# Altium PCB ESCV2.PcbDoc
Units mil, origin at the board's own origin, x right, y up, seen from the top; angles counter-clockwise.
Board outline 2362.2 x 1181.1 mil, 2 copper layers (L1, L2), stack 65.792 mil thick; 69 components, 45 nets, 192 pads, 37 vias.
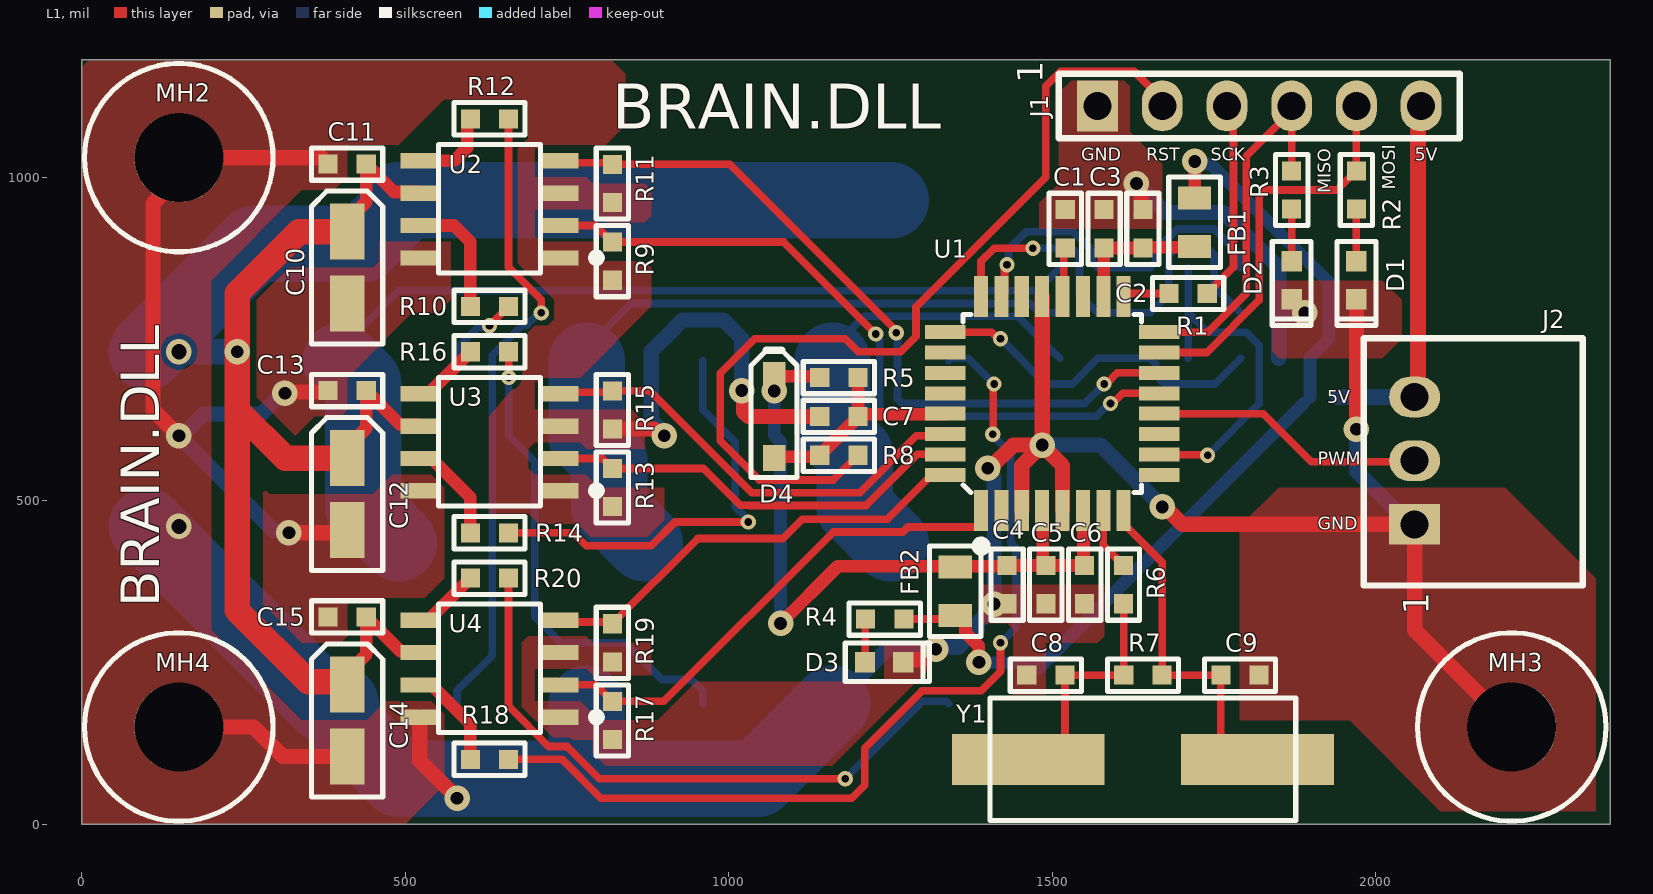
[diagram p0: L1 view]
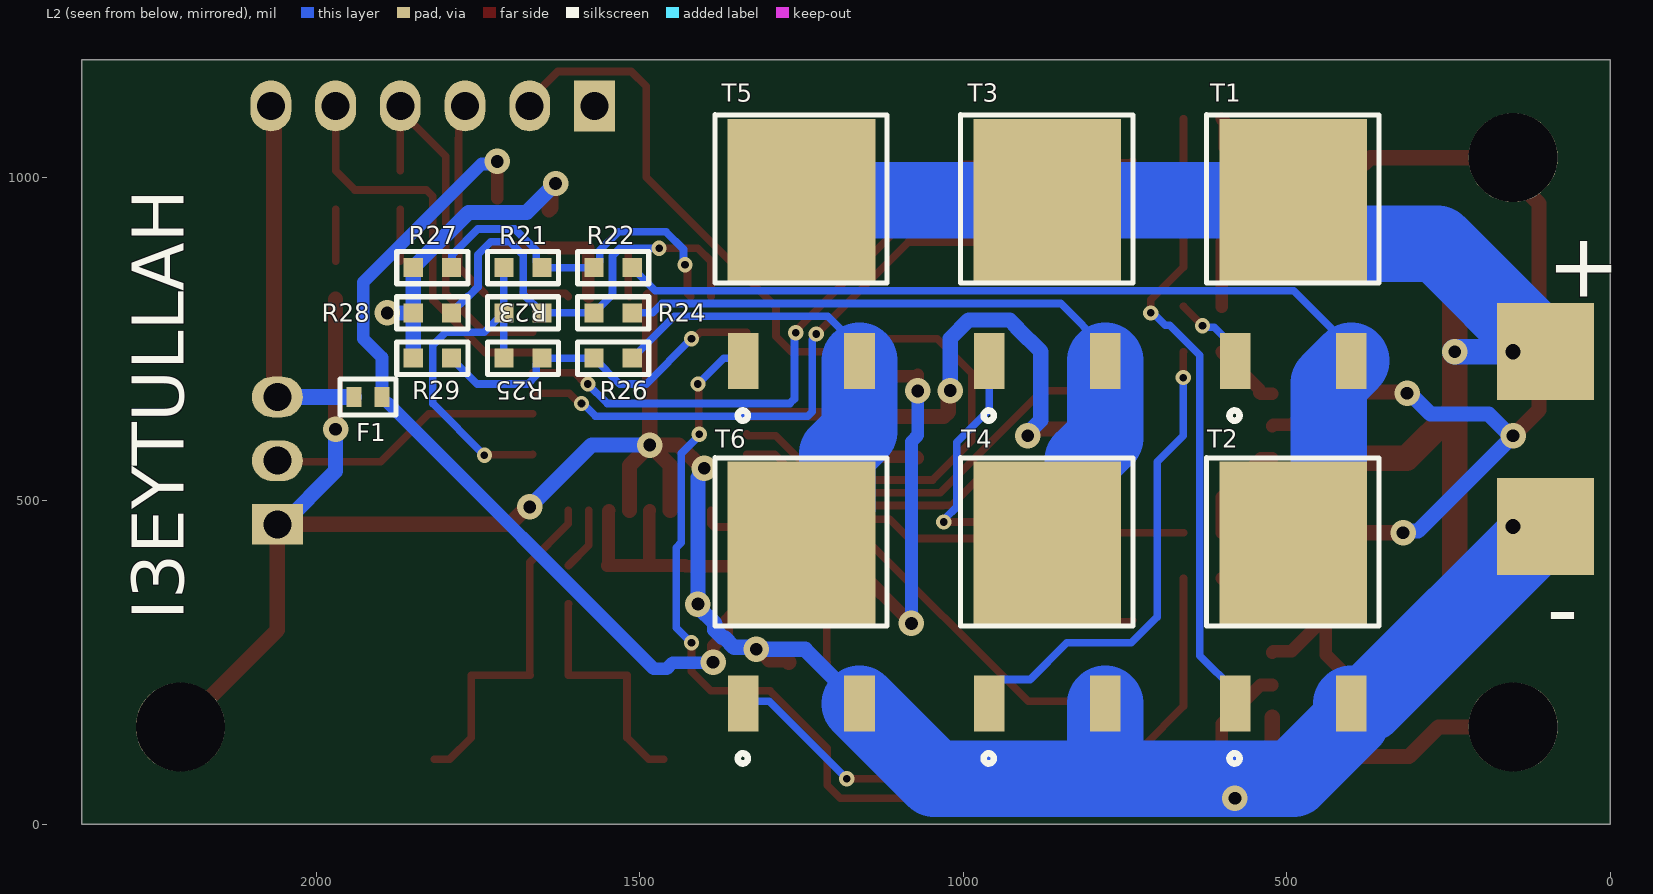
[diagram p1: L2 view, seen from below]
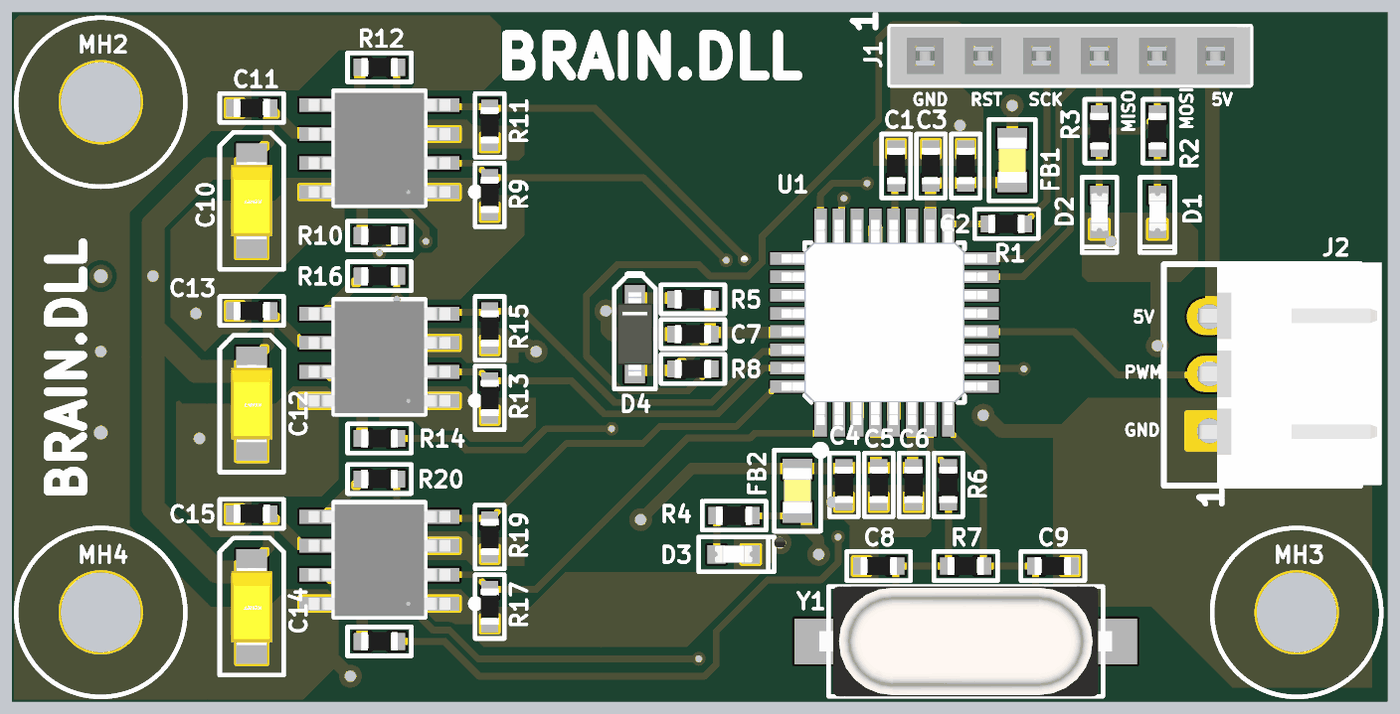
[diagram p2: 3D render of the assembled board from above, using the file's embedded part models]
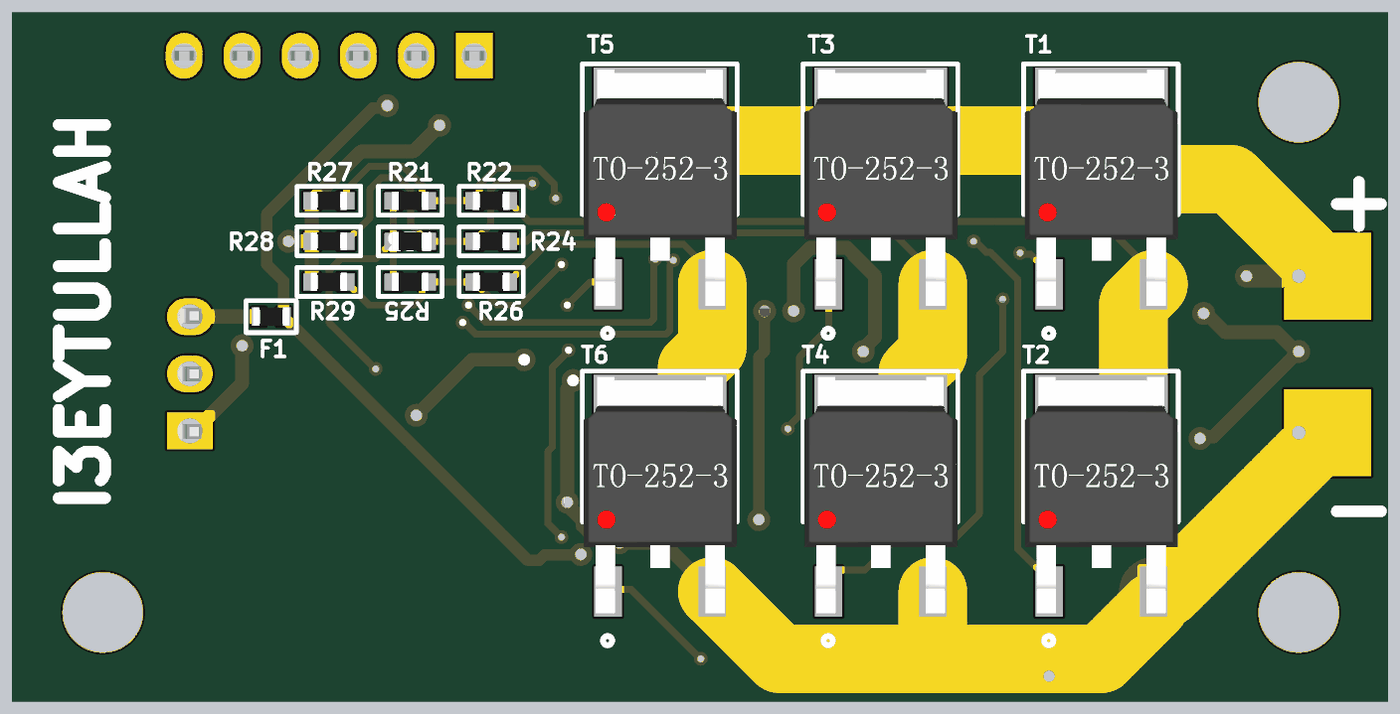
[diagram p3: 3D render of the assembled board from below, using the file's embedded part models]

## Layer stack, top to bottom
Top Solder: solder mask 0.4, Solder Resist, Dk 3.5
L1: signal copper 1.4
Dielectric 1: dielectric 62.9921, FR-4, Dk 4.8
L2: signal copper 1.4
Bottom Solder: solder mask 0.4, Solder Resist, Dk 3.5

## Board outline
0,0 0,1181.1 2362.2,1181.1 2362.2,0

## Design rules (kind name [scope] priority, off if disabled: settings)
Clearance [All] p1: gap=7.87 ignorepadtopadclearanceinfootprint=FALSE
ComponentClearance [All] p1: gap=7.87 collisioncheckmode=3 verticalgap=7.87 showdistances=FALSE
HoleSize [All] p1: absolutevalues=TRUE maxlimit=393.7 minlimit=7.87 maxpercent=80.000 minpercent=20.000
HoleToHoleClearance [All] p1: gap=11.81 allowstackedmicrovias=TRUE
MinimumSolderMaskSliver [All] p1: minsoldermaskwidth=3.94
PolygonConnect [All] p1: connectstyle=Direct reliefconductorwidth=10 reliefentries=4 polygonreliefangle="90 Angle" airgapwidth=10
RoutingVias [All] p1: holewidth=11.81 width=23.62 viastyle="Through Hole" minholewidth=11.81 minwidth=23.62 maxholewidth=23.62 maxwidth=39.37
SilkToSilkClearance [All] p1: silktosilkclearance=3.94
SilkToSolderMaskClearance [IsPad] p1: minsilkscreentomaskgap=0 clearancetoexposedcopper=TRUE
SilkToSolderMaskClearance U3-ALL [IsPad] p2: minsilkscreentomaskgap=3.94 clearancetoexposedcopper=TRUE
SolderMaskExpansion [All] p1: expansion=3.94 istentingtop=FALSE
Width Width_POWER [InNet('+*') or InNet('GND') OR InNet('phase*')] p1: maxlimit=118.11 minlimit=11.81 preferedwidth=11.81
Width [All] p2: maxlimit=19.68 minlimit=11.81 preferedwidth=11.81
24 further rules are at their usual default settings.

## Classes and differential pairs
component class ESC2: + - C10 C11 C12 C13 C14 C15 J2 MH2 MH3 MH4 R9 R10 R11 R12 R13 R14 R15 R16 R17 R18 R19 R20 R21 R22 R23 R24 R25 R26 R27 R28 R29 T1 T2 T3 T4 T5 T6 U2 U3 U4
component class ESC1: C1 C2 C3 C4 C5 C6 C7 C8 C9 D1 D2 D3 D4 F1 FB1 FB2 J1 R1 R2 R3 R4 R5 R6 R7 R8 U1 Y1

## Components (designator, comment, footprint, x,y, rotation, side; value= is the part's Value field where it differs from the comment)
+ "PAD" SQARE_PAD 100,730 r180 bottom (schematic designator P1)
- "PAD" SQARE_PAD 100,460 r180 bottom (schematic designator P2)
C1 "100nF" Z0603 1520,920 r90 top
C2 "10uF" Z0603 1640,920 r270 top
C3 "100nF" Z0603 1580,920 r270 top
C4 "10uF" Z0603 1430,370 r90 top
C5 "100nF" Z0603 1490,370 r90 top
C6 "100nF" Z0603 1550,370 r90 top
C7 "100nF" Z0603 1170,630 r0 top
C8 "22pF" Z0603 1490,230 r180 top
C9 "22pF" Z0603 1790,230 r0 top
C10 "1uF" "1206 TANTAL CAP" 410,860 r270 top
C11 "100nF" Z0603 410,1020 r180 top
C12 "1uF" "1206 TANTAL CAP" 410,510 r270 top
C13 "100nF" Z0603 410,670 r180 top
C14 "1uF" "1206 TANTAL CAP" 410,160 r270 top
C15 "100nF" Z0603 410,320 r180 top
D1 "GREEN" LED-0603 1970,840.47 r90 top
D2 "BLUE" LED-0603 1870,840.47 r90 top
D3 "RED" LED-0603 1240,250 r180 top
D4 "SS0540_R1_00001" SOD-123 1070,630 r270 top
F1 "FSMD075-0603RZ" F-0603 1920,660 r180 bottom
FB1 "LCB2012-110Y-N" C0805 1720,930 r270 top
FB2 "LCB2012-110Y-N" C0805 1350,360 r90 top
J1 "HEADER-FEMALE-1X6-2.54mm" FEMALE-1X6-2.54MM 1570,1110 r90 top
J2 "2.50 mm" L-KLS1-XL4-2.50-03-R 2060,561.57 r90 top
MH2 "MH_7.4MMC_3.2MMD" MH_7.4MMC_3.2MMD_NON_COPPER_NPLT 150,1030 r0 top
MH3 "MH_7.4MMC_3.2MMD" MH_7.4MMC_3.2MMD_NON_COPPER_NPLT 2210,150 r0 top
MH4 "MH_7.4MMC_3.2MMD" MH_7.4MMC_3.2MMD_NON_COPPER_NPLT 150,150 r0 top
R1 "22R" Z0603 1710,820 r180 top
R2 "1K" Z0603 1970,980 r90 top
R3 "1K" Z0603 1870,980 r90 top
R4 "1K" Z0603 1241,316.81 r0 top
R5 "10K" Z0603 1170,690 r180 top
R6 "22R" Z0603 1610,370 r90 top
R7 "1M" Z0603 1640,230 r0 top
R8 "100R" Z0603 1170,570 r180 top
R9 "4K7" Z0603 820,870 r90 top
R10 "100R" Z0603 630,800 r180 top
R11 "4K7" Z0603 820,990 r90 top
R12 "100R" Z0603 630,1090 r180 top
R13 "4K7" Z0603 820,520 r90 top
R14 "100R" Z0603 630,450 r180 top
R15 "4K7" Z0603 820,640 r90 top
R16 "100R" Z0603 630,730 r180 top
R17 "4K7" Z0603 820,160 r90 top
R18 "100R" Z0603 630,100 r180 top
R19 "4K7" Z0603 820,280 r90 top
R20 "100R" Z0603 630,380 r180 top
R21 "33K" Z0603 1680.47,860 r180 bottom
R22 "33K" Z0603 1540.94,860 r180 bottom
R23 "33K" Z0603 1680.47,790 r180 bottom
R24 "33K" Z0603 1540.94,790 r180 bottom
R25 "33K" Z0603 1680.47,720 r180 bottom
R26 "33K" Z0603 1540.94,720 r180 bottom
R27 "10K" Z0603 1820.47,860 r0 bottom
R28 "10K" Z0603 1820.47,790 r0 bottom
R29 "10K" Z0603 1820.47,720 r0 bottom
T1 "IRLR7843TRPBF" TO-252-3 490,840 r90 bottom
T2 "IRLR7843TRPBF" TO-252-3 490,310 r90 bottom
T3 "IRLR7843TRPBF" TO-252-3 870,840 r90 bottom
T4 "IRLR7843TRPBF" TO-252-3 870,310 r90 bottom
T5 "IRLR7843TRPBF" TO-252-3 1250,840 r90 bottom
T6 "IRLR7843TRPBF" TO-252-3 1250,310 r90 bottom
U1 "ATMEGA88PA-AU" TQFP32(ATMEGA88) 1500,650 r90 top
U2 "TC427COA" SOIC-8 630,950 r180 top
U3 "TC427COA" SOIC-8 630,590 r180 top
U4 "TC427COA" SOIC-8 630,240 r180 top
Y1 "AS-16.000-16-SMD-TR" AS-16.000-16-SMD-TR 1640,100 r0 top

## Footprints (in the part's own frame and the unit in brackets; to place one, negate y for a bottom-side part, rotate by r counter-clockwise, add the part's x,y. Pads: shape width x height; smd on the part's side, far side on the other; paste and mask are expansions set on the pad)
"1206 TANTAL CAP" [mm]
  rect 2.2x1.35 smd: 1(-1.41,0) 2(1.41,0)
  silkscreen extent -3,-1.4 3,1.4, body extent -1.7,-0.9 1.7,0.9, height 1.82
AS-16.000-16-SMD-TR [mm]
  rect 6x2 smd: 1(-4.5,0) 2(4.5,0)
  silkscreen extent -6,-2.4 6,2.4, body extent -6.4,-2.41 6.4,2.41, height 4.3
C0805 [mm]
  rect 0.9x1.3 smd: 1(-0.95,0) 2(0.95,0)
  silkscreen extent -1.78,-1.02 1.78,1.02, body extent -1,-0.63 1,0.63, height 0.7
F-0603 [mm]
  rect 0.6x0.8 smd: 1(-0.55,0) 2(0.55,0)
  silkscreen extent -1.1,-0.7 1.1,0.7, body extent -0.8,-0.4 0.8,0.4, height 0.46
FEMALE-1X6-2.54MM [mm]
  rect 2x1.6 hole 1.1: 1(0,0)
  oval 2x1.6 hole 1.1: 2(0,-2.54) 3(0,-5.08) 4(0,-7.62) 5(0,-10.16) 6(0,-12.7)
  silkscreen extent -1.27,-14.22 1.27,1.52, body extent -1.27,-14.22 1.27,1.52, height 8.8
L-KLS1-XL4-2.50-03-R [mm]
  rect 1.6x2 hole 1.1: 1(-2.5,0)
  oval 1.6x2 hole 1.1: 2(0,0) 3(2.5,0)
  silkscreen extent -4.9,-6.6 4.8,2, body extent -4.88,-7.53 4.88,0.5, height 5.85
LED-0603 [mm]
  rect 0.8x0.8 smd: 1(-0.75,0) 2(0.75,0)
  silkscreen extent -1.78,-0.76 1.52,0.76, body extent -0.82,-0.38 0.82,0.35, height 0.68
MH_7.4MMC_3.2MMD_NON_COPPER_NPLT [mm]
  round 3.5 hole 3.5: 1(0,0)
  silkscreen extent -3.7,-3.7 3.7,3.7
SOD-123 [mm]
  rect 1.02x0.88 smd: 1(-1.635,0) 2(1.635,0)
  silkscreen extent -2.6,-0.9 2.4,0.9, body extent -1.83,-0.77 1.83,0.77, height 1.46
SOIC-8 [mm]
  rect 1.52x0.6 smd: 1(-2.74,1.905) 2(-2.74,0.635) 3(-2.74,-0.635) 4(-2.74,-1.905) 5(2.74,-1.905) 6(2.74,-0.635) 7(2.74,0.635) 8(2.74,1.905)
  silkscreen extent -4.4,-2.54 2,2.5, body extent -3.1,-2.45 3.1,2.45, height 1.76
SQARE_PAD [mil]
  rect 150x150 smd paste-99999 mask+4: 1(0,0)
TO-252-3 [mm]
  rect 2.2x1.2 smd: 1(-3.15,2.28) 3(-3.15,-2.28)
  rect 6.4x5.8 smd: 2(3.15,0)
  silkscreen extent -5.5,-3.36 6.51,3.4, body extent -4.1,-3.35 6.25,3.35, height 2.41
TQFP32(ATMEGA88) [mm]
  rect 1.6x0.55 smd mask+0.06: 1(-4.2,2.8) 2(-4.2,2) 3(-4.2,1.2) 4(-4.2,0.4) 5(-4.2,-0.4) 6(-4.2,-1.2) 7(-4.2,-2) 8(-4.2,-2.8) 17(4.2,-2.8) 18(4.2,-2) 19(4.2,-1.2) 20(4.2,-0.4) 21(4.2,0.4) 22(4.2,1.2) 23(4.2,2) 24(4.2,2.8)
  rect 0.55x1.6 smd mask+0.06: 9(-2.8,-4.2) 10(-2,-4.2) 11(-1.2,-4.2) 12(-0.4,-4.2) 13(0.4,-4.2) 14(1.2,-4.2) 15(2,-4.2) 16(2.8,-4.2) 25(2.8,4.2) 26(2,4.2) 27(1.2,4.2) 28(0.4,4.2) 29(-0.4,4.2) 30(-1.2,4.2) 31(-2,4.2) 32(-2.8,4.2)
  silkscreen extent -5.8,-3.5 3.5,3.5, body extent -4.5,-4.5 4.5,4.5, height 1.18
Z0603 [mm]
  rect 0.75x0.75 smd: 1(-0.75,0) 2(0.75,0)
  silkscreen extent -1.4,-0.64 1.4,0.64, body extent -0.8,-0.4 0.8,0.4, height 0.46

## Part data
+ -: library part SQARE_PAD
C1 C3 C5 C6 C7 C11 C13 C15: library part CL10B104KB8NNNC, "Multi Layer Ceramic Capacitor (MLCC) / Cap Ceramic 0.1uF 50V X7R 10% Pad SMD 0603 125¡ãC T/R", Case Code (Metric)=1608, Case Code (Imperial)=0603, Dielectric=X7R, Manufacturer=Samsung, Max Operating Temperature=125°C, Min Operating Temperature=-55°C, Package Quantity=1, Supplier Part Number 1=7665443, Tolerance=10%, Voltage=50V, Capacitance=100nF, Case/Package=0603, Category="Ceramic Capacitors", ComponentLink4Description=OZDISAN_LINK, ComponentLink4URL=https://ozdisan.com/pasif-komponentler/kondansatorler/smt-smd-ve-mlcc-kondansatorler/CL10B104KB8NNNC, Construction=Flat, Contact Plating=Tin, Depth=0.8mm, Height=0.8mm, Lead Free="Lead Free", Length=1.6mm, Manufacturer Part Number=CL10B104KB8NNNC, Material=Ceramic, Mount="Surface Mount", OZDISAN_PRICE="0.05 TRY", Packaging="Tape and Reel", Pricing 1="4000=0,00800, 8000=0,00800, 16000=0,00800, 24000=0,00700, 40000=0,00600, 4000=0,00600, 8000=0,00600, 16000=0,00600, 24000=0,00500, 40000=0,00400 (USD)", Radiation Hardening=No, RoHS=Yes, RoHS Compliant=Yes, Series=CL, Stock 1=17024000, Supplier 1=RSComponents, Thickness=0.035inch, Voltage Rating=50V, Voltage Rating (DC)=50V, Width=0.031inch
C2 C4: library part CL10A106KP8NNNC, "Cap Ceramic 10uF 10V X5R 10% Pad SMD 0603 85C T/R", Case Code (Metric)=1608, Case Code (Imperial)=0603, Dielectric=X5R, Manufacturer=Samsung, Max Operating Temperature=85°C, Min Operating Temperature=-55°C, Package Quantity=1, Supplier Part Number 1=5232459, Tolerance=10%, Voltage Rating=10V, Capacitance=10uF, Case/Package=0603, Category="Ceramic Capacitors", ComponentLink4Description=OZDISAN_LINK, ComponentLink4URL=https://ozdisan.com/Product/Detail/350863/CL10A106KP8NNNC, Construction=Flat, Contact Plating=Tin, Depth=0.8mm, Height=0.8mm, Lead Free="Lead Free", Length=1.6mm, Manufacturer Part Number=CL10A106KP8NNNC, Material=Ceramic, Mount="Surface Mount", OZDISAN_PRICE="0.60 TRY", Packaging="Tape and Reel", Pricing 1="4000=0,03170, 8000=0,02840, 12000=0,02830, 20000=0,02810, 40000=0,02790 (USD)", Radiation Hardening=No, RoHS=Yes, RoHS Compliant=Yes, Series=CL, Stock 1=202000, Supplier 1="Future Electronics", Thickness=0.035inch, Voltage Rating (DC)=10V, Width=0.031inch
C8 C9: library part CL10C220JB8NNNC, "Ceramic capacitor SMD-0603 22pF /50V NP0# J +-5%, Samsung, RoHS", Case Code (Metric)=1608, Case Code (Imperial)=0603, Dielectric=C0G, Manufacturer=Samsung, Max Operating Temperature=125°C, Min Operating Temperature=-55°C, Package Quantity=1, Supplier Part Number 1=7665033, Temperature Coefficient=300ppm/°C, Tolerance=5%, Voltage=50V, Capacitance=22pF, Case/Package=0603, Category="Ceramic Capacitors", ComponentLink5Description=OZDISAN_LINK, ComponentLink5URL=https://ozdisan.com/pasif-komponentler/kondansatorler/smt-smd-ve-mlcc-kondansatorler/CL10C220JB8NNNC, Contact Plating=Tin, Depth=0.8mm, Height=0.8mm, Lead Free="Lead Free", Length=0.063inch, Manufacturer Part Number=CL10C220JB8NNNC, Material=Ceramic, Mount="Surface Mount", OZDISAN_PRICE="0.09 TRY", Packaging="Tape and Reel", Pricing 1="4000=0,01100, 8000=0,01100, 16000=0,01000, 24000=0,00800, 40000=0,00700 (USD)", Radiation Hardening=No, RoHS=Yes, RoHS Compliant=Yes, Series=CL, Stock 1=1, Supplier 1=RSComponents, Thickness=0.035inch, Voltage Rating=50V, Voltage Rating (DC)=50V, Width=0.031inch
C10 C12 C14: library part T491A105K035AT, "Cap Tant Solid 1uF 35V A CASE 10% (3.2 X 1.6 X 1.6mm) SMD 3216-18 7.5 Ohm 125 C T/R", Case Code (Metric)=3216, Case Code (Imperial)=1206, Dielectric Material=Tantalum, ESR (Equivalent Series Resistance)=7.5R, Leakage Current=500nA, Manufacturer=KEMET, Max Operating Temperature=125°C, Min Operating Temperature=-55°C, Package Quantity=1, Ripple Current=100mA, Supplier Part Number 1=399-8265-1-ND, Tolerance=20%, Voltage=25V, Voltage Rating=35V, Capacitance=1uF, Case/Package=1206, Category="Tantalum Capacitors", ComponentLink12Description=OZDISAN_LINK, ComponentLink12URL=https://ozdisan.com/pasif-komponentler/kondansatorler/tantal-kondansatorler/T491A105K035AT, Depth=1.6mm, Dissipation Factor=4%, Failure Rate=0.001%, Features="General Purpose", Height=1.6mm, Height - Seated (Max)=0.071inch, Lead Free="Lead Free", Length=3.2mm, Life (Hours)=2000Hour, Manufacturer Part Number=T491A105K035AT, Mount="Surface Mount,PCB", Number of Pins=2, OZDISAN_PRICE="1.78 TRY", Packaging="Tape and Reel", Polarity=Polar, Pricing 1="1=0,53000, 10=0,37100, 50=0,26000, 100=0,22290, 500=0,16716, 1000=0,14115 (USD)", Radiation Hardening=No, REACH SVHC="No SVHC", RoHS=Yes, RoHS Compliant=Yes, Stock 1=48, Supplier 1=Digi-Key, Termination=SMD/SMT, Voltage Rating (DC)=35V, Width=1.6mm
D1: library part HL-PST-1608U51GC, Case-Package=0603, ComponentLink1Description=OZDISAN_LINK, ComponentLink1URL=https://ozdisan.com/Product/Detail/471660/HL-PST-1608U51GC, OZDISAN_PRICE="0.22 TRY"
D2: library part 27-21/B7C-ZR1S1N/3C, Case-Package=0603, ComponentLink1Description=OZDISAN_LINK, ComponentLink1URL=https://ozdisan.com/led-ve-aydinlatma-cozumleri/led-komponentler/sinyal-ledler-renkli/27-21B7C-ZR1S1N3C, OZDISAN_PRICE="1,46 TRY"
D3: library part LTST-C190KRKT, "0603 red led alingap 631nm-639nm water clear 18-180mcd 130d", Case Code (Metric)=1608, Case Code (Imperial)=0603, Color=Red, Forward Current=30mA, Forward Voltage=2.4V, Lens Color=Colorless, Manufacturer="Vishay Lite-On", Max Operating Temperature=85°C, Min Operating Temperature=-55°C, Package Quantity=1, Power Dissipation=75mW, Reverse Voltage=5V, Supplier Part Number 1=160-1436-1-ND, Test Current=20mA, Case/Package=0603, Category=LEDs, ComponentLink10Description=OZDISAN_LINK, ComponentLink10URL=https://ozdisan.com/led-ve-aydinlatma-cozumleri/led-komponentler/sinyal-ledler-renkli/LTST-C190KRKT, Depth=0.8mm, Dominant Wavelength=631nm, Height=0.8mm, Lead Free="Lead Free", Length=1.6mm, Lens Style=Diffused,Colorless,Clear,Rectangular, Lens Transparency=Clear, Luminous Intensity=54mcd, Manufacturer Part Number=LTST-C190KRKT, Mount="Surface Mount", Number of Elements=1, Number of LEDs=1, Number of Pins=2, OZDISAN_PRICE="0.38 TRY", Packaging="Tape and Reel", Power Rating=75mW, Pricing 1="1=0,24000, 10=0,13200, 100=0,06110, 500=0,05640, 1000=0,04418, 2000=0,04324 (USD)", Radiation Hardening=No, RoHS=Yes, RoHS Compliant=Yes, Stock 1=874288, Supplier 1=Digi-Key, Viewing Angle=130°, Wavelength=639nm, Width=0.8mm, Illumination Color=Red
D4: "Diode Schottky 40V 0.5A 2-Pin SOD-123 T/R", Manufacturer="Pan Jit", Max Operating Temperature=125°C, Max Repetitive Reverse Voltage (Vrrm)=40V, Min Operating Temperature=-55°C, Peak Non-Repetitive Surge Current=5.5A, Supplier Part Number 1=3757-SS0540_R1_00001CT-ND, Category="Rectifier Diodes", ComponentLink3Description=OZDISAN_LINK, ComponentLink3URL=https://ozdisan.com/guc-yari-iletkenleri/diyotlar-modul-diyotlar-ve-dogrultucular/schottky-diyotlar/SS0540R100001, Element Configuration=Single, Manufacturer Part Number=SS0540_R1_00001, Mount="Surface Mount", OZDISAN_PRICE="0.55 TRY", Pricing 1="1=0,29000, 10=0,23400, 100=0,12410, 500=0,08168, 1000=0,05554 (USD)", Radiation Hardening=No, RoHS=Yes, RoHS Compliant=Yes, Stock 1=6025, Supplier 1=Digi-Key
F1: Case-Package=0603, Current Rating=0.75, Max Voltage=6V, ComponentLink1Description=OZDISAN_LINK, ComponentLink1URL=https://ozdisan.com/guc-yari-iletkenleri/devre-koruyucu-komponentler/ptc-sigortalar/FSMD075-0603RZ, OZDISAN_PRICE="3.16 TRY"
FB1 FB2: Case-Package=0603, ComponentLink1Description=OZDISAN_LINK, ComponentLink1URL=https://ozdisan.com/pasif-komponentler/induktorler/bead-feritler/LCB2012-110Y-N, OZDISAN_PRICE="0,22 TRY"
J1: library part PPPC061LFBN-RC, "CONN HDR 6POS 0.1 GOLD PCB", Color=Black, Manufacturer=Sullins, Package Quantity=1000, Supplier Part Number 1=S7039-ND, Category=Connectors, ComponentLink1Description=https://media.digikey.com/pdf/Data%20Sheets/Sullins%20PDFs/Female_Headers.100_DS.pdf?src-supplier=Digi-Key, ComponentLink1URL=https://media.digikey.com/pdf/Data%20Sheets/Sullins%20PDFs/Female_Headers.100_DS.pdf?src-supplier=Digi-Key, Connector Type=Header,Socket, Contact Material=Bronze, Contact Plating=Gold, Height=8.5mm, Housing Material=Plastic, Lead Free="Lead Free", Length=15.7mm, Manufacturer Part Number=PPPC061LFBN-RC, Mount="Through Hole", Number of Positions=6, Number of Rows=1, Packaging=Bulk, Pitch=0.1inch, Pricing 1="1=0,53000, 10=0,46500, 80=0,38300, 440=0,33300, 1000=0,27472, 5000=0,24142, 10000=0,24050 (USD)", RoHS=Yes, Stock 1=33601, Supplier 1=Digi-Key, Termination=Solder, Width=2.5mm
J2: library part L-KLS1-XL4-2.50-03-R, ComponentLink1Description=OZDISAN_LINK, ComponentLink1URL=https://ozdisan.com/konnektor-ve-baglanti-elemanlari/konnektor-cesitleri/pcb-konnektorler/L-KLS1-XL4-2-50-03-R, OZDISAN_PRICE="0,27 TRY"
MH2 MH3 MH4: library part MH_7.4MMNC_3.2MMD, "Mounting Hole 7.4 mm Diameter (Non Copper), 3.2 mm Drill NPTH"
R1 R6: library part MC0603SAF220JT5E, "MULTICOMP         MC0603SAF220JT5E            RESISTOR, THICK FILM, 22OHM, 100mW, 1%", Case Code (Metric)=1608, Case Code (Imperial)=0603, Manufacturer=Multicomp, Power Rating=100mW, Resistance Tolerance=1%, Resistor Type="Thick Film", Supplier Part Number 1=79M5934, Temperature Coefficient=100ppm/°C, Voltage Rating=75V, Case/Package=0603, Category=Resistors, ComponentLink2Description=OZDISAN_LINK, ComponentLink2URL=https://ozdisan.com/pasif-komponentler/direncler/smt-smd-ve-cip-direncler/0603SAF220JT5E, Manufacturer Part Number=MC0603SAF220JT5E, Number of Pins=2, OZDISAN_PRICE="0.02 TRY", Packaging="Cut Tape", REACH SVHC=Unknown, Resistance=22R, RoHS=Yes, RoHS Compliant=Yes, Supplier 1=Newark, Tolerance=1%, Voltage Rating (DC)=75V
R2 R3 R4: library part MC0603SAF1001T5E, "MULTICOMP - MC0603SAF1001T5E - THICK FILM RESISTOR, 1KOHM, 100mW, 1%", Case Code (Metric)=1608, Case Code (Imperial)=0603, Manufacturer=Multicomp, Power Rating=100mW, Resistance=1kR, Resistance Tolerance=1%, Resistor Type="Thick Film", Supplier Part Number 1=1632391, Temperature Coefficient=100ppm/°C, Voltage Rating=75V, Case/Package=0603, Category=Resistors, ComponentLink2Description=OZDISAN_LINK, ComponentLink2URL=https://ozdisan.com/pasif-komponentler/direncler/smt-smd-ve-cip-direncler/0603SAF1001T5E, Manufacturer Part Number=MC0603SAF1001T5E, OZDISAN_PRICE="0.02 TRY", Packaging="Cut Tape", Pricing 1="1=0,00890, 10=0,00810, 100=0,00730, 1000=0,00390 (GBP)", REACH SVHC=Unknown, RoHS=Yes, RoHS Compliant=Yes, Stock 1=340, Supplier 1=Farnell, Tolerance=1%, Voltage Rating (DC)=75V
R5 R27 R28 R29: library part CQ03SAF1002T5E, Case-Package=0603, ComponentLink1Description=OZDISAN_LINK, ComponentLink1URL=https://ozdisan.com/pasif-komponentler/direncler/smt-smd-ve-cip-direncler/CQ03SAF1002T5E, OZDISAN_PRICE="0.03 TRY"
R7: library part MC0603SAF1004T5E, "Res General Purpose Thick Film 0603 1M Ohm 1% 1/10W ±100ppm/°C Molded T/R", Case Code (Metric)=1608, Case Code (Imperial)=0603, Manufacturer=Multicomp, Power Rating=100mW, Resistance=1MR, Resistance Tolerance=1%, Resistor Type="Thick Film", Supplier Part Number 1=1631320, Temperature Coefficient=100ppm/°C, Voltage Rating=75V, Case/Package=0603, Category=Uncategorized, ComponentLink1Description=https://datasheet.ciiva.com/7919/ta-677-7919113.pdf?src-supplier=Element14, ComponentLink1URL=https://datasheet.ciiva.com/7919/ta-677-7919113.pdf?src-supplier=Element14, ComponentLink2Description=ÖZDISAN_LINK, ComponentLink2URL=https://ozdisan.com/pasif-komponentler/direncler/smt-smd-ve-cip-direncler/0603SAF1004T5E, Manufacturer Part Number=MC0603SAF1004T5E, OZDISAN_PRICE="0.02 TRY", Packaging="Cut Tape", Pricing 1="1=0,00910, 10=0,00830, 100=0,00740, 1000=0,00400 (GBP)", REACH SVHC=Unknown, RoHS=Yes, RoHS Compliant=Yes, Stock 1=15998, Supplier 1=Farnell, Tolerance=1%, Voltage Rating (DC)=75V
R8 R10 R12 R14 R16 R18 R20: library part 0603SAJ0101T5E, Case-Package=0603, ComponentLink1Description=OZDISAN_LINK, ComponentLink1URL=https://ozdisan.com/pasif-komponentler/direncler/smt-smd-ve-cip-direncler/0603SAJ0101T5E, OZDISAN_PRICE="0.02 TRY"
R9 R11 R13 R15 R17 R19: library part MC0603SAF4701T5E, "RES, THICK FILM, 4K7, 1%, 0.1W, 0603; Resistance: 4.7kohm; Resistance Tolerance: ± 1%; Power Rating: 100mW; Resistor...", Case Code (Metric)=1608, Case Code (Imperial)=0603, Manufacturer=Multicomp, Power Rating=100mW, Resistance=4.7kR, Resistance Tolerance=1%, Resistor Type="Thick Film", Supplier Part Number 1=1632439, Temperature Coefficient=100ppm/°C, Voltage Rating=75V, Case/Package=0603, Category=Uncategorized, ComponentLink2Description=OZDISAN_LINK, ComponentLink2URL=https://ozdisan.com/pasif-komponentler/direncler/smt-smd-ve-cip-direncler/0603SAF4701T5E, Manufacturer Part Number=MC0603SAF4701T5E, Number of Pins=2, OZDISAN_PRICE="0.02 TRY", Packaging="Cut Tape", Pricing 1="1=0,00890, 10=0,00810, 100=0,00730, 1000=0,00400 (GBP)", REACH SVHC=Unknown, RoHS=Yes, RoHS Compliant=Yes, Supplier 1=Farnell, Tolerance=1%, Voltage Rating (DC)=75V
R21 R22 R23 R24 R25 R26: library part RI0603L3302FT, Case-Package=0603, ComponentLink1Description=OZDISAN_LINK, ComponentLink1URL=https://ozdisan.com/pasif-komponentler/direncler/smt-smd-ve-cip-direncler/TC0325B3302T5C, OZDISAN_PRICE="0.09 TRY"
T1 T2 T3 T4 T5 T6: "MOSFET, 30V, 161A, 3.3 mOhm, 34 nC Qg, Logic Level, D-Pak", Case/Package=DPAK, Continuous Drain Current (ID)=161A, Drain to Source Breakdown Voltage=30V, Drain to Source Resistance=3.3mR, Drain-source On Resistance-Max=3.3MR, Gate to Source Voltage (Vgs)=20V, Manufacturer="International Rectifier", Max Operating Temperature=175°C, Max Power Dissipation=140W, Min Operating Temperature=-55°C, Package Quantity=1, Supplier Part Number 1=70017418, Input Capacitance=4.38nF, Category=MOSFETs, ComponentLink1Description=OZDISAN_LINK, ComponentLink1URL=https://www.ozdisan.com/guc-yari-iletkenleri/mosfetler/mosfet-discrete/IRLR7843TRPBF, Current Rating=161A, Drain to Source Voltage (Vdss)=30V, Element Configuration=Single, Fall Time=19ns, Height=2.39mm, Lead Free="Lead Free", Length=6.73mm, Manufacturer Part Number=IRLR7843TRPBF, Mount="Surface Mount", Nominal Vgs=2.3V, Number of Elements=1, Number of Pins=3, On-State Resistance=3.3MR, OZDISAN_PRICE="14,41 TRY", Packaging="Cut Tape", Power Dissipation=140W, Radiation Hardening=No, Rds On Max=3.3mR, REACH SVHC="No SVHC", Rise Time=42ns, RoHS=Yes, RoHS Compliant=Yes, Series=HEXFET®, Supplier 1="Allied Electronics", Turn-Off Delay Time=34ns, Turn-On Delay Time=25ns, Voltage Rating (DC)=30V, Width=6.22mm
U1: "MCU 8-bit ATmega AVR RISC 8KB Flash 2.5V/3.3V/5V 32-Pin TQFP", Case/Package=A, Frequency=20MHz, Manufacturer="Microchip / Atmel", Max Operating Temperature=85°C, Max Supply Voltage=5.5V, Min Operating Temperature=-40°C, Min Supply Voltage=1.8V, Package Quantity=250, Voltage=5V, Category=Microcontrollers, ComponentLink4Description=OZDISAN_LINK, ComponentLink4URL=https://ozdisan.com/entegre-devreler-ics/embedded-entegreler/mikroislemciler/ATMEGA88PA-AU, Contact Plating=Tin,Matte, Core Architecture=AVR, Data Bus Width=8b, Density=8KB, Height=1.05mm, Lead Free="Lead Free", Length=7mm, Manufacturer Part Number=ATMEGA88PA-AU, Max Frequency=20MHz, Memory Size=8KB, Memory Type=FLASH, Mount="Surface Mount", Number of ADC Channels=8, Number of Pins=32, Number of Programmable I/O=23, Number of PWM Channels=6, Number of SPI Channels=1, Number of Timers/Counters=3, Number of I2C Channels=1, Number of I/Os=23, Oscillator Type=Internal, OZDISAN_PRICE="33,63 TRY", Packaging=Tray, Peripherals="Brown-out Detect/Reset,POR,PWM,WDT", Radiation Hardening=No, RAM Size=1KB, REACH SVHC="No SVHC", RoHS=Yes, Series="AVR® ATmega", Supplier 1="Arrow Electronics", Supplier Part Number 1=ATMEGA88PA-AU, Termination=SMD/SMT, Watchdog Timer=Yes, Width=7mm, Interface=SPI,UART,I2C,USART,2-Wire
U2 U3 U4: "IC MOSFET DVR 1.5A DUAL HS 8SOIC", Case/Package=SOIC, Manufacturer=Microchip, Max Operating Temperature=70°C, Max Output Current=1.5A, Max Power Dissipation=470mW, Max Supply Current=8mA, Max Supply Voltage=18V, Min Operating Temperature=0°C, Min Supply Voltage=4.5V, Operating Supply Voltage=16V, Package Quantity=100, Supplier Part Number 1=TC427COA-ND, Category="Gate Drivers", ComponentLink5Description=OZDISAN_LINK, ComponentLink5URL=https://ozdisan.com/entegre-devreler-ics/guc-entegreleri/guc-surucu-entegreleri/TC427COA, Fall Time=30ns, Height=1.42mm, Lead Free="Lead Free", Length=4.9mm, Manufacturer Part Number=TC427COA, Mount="Surface Mount", Nominal Supply Current=8mA, Number of Drivers=2, Number of Outputs=2, Number of Pins=8, Output Impedance=6R, OZDISAN_PRICE="20,56 TRY", Packaging=Rail/Tube, Power Dissipation=470mW, Pricing 1="1=1,45000, 25=1,19800, 100=1,08120 (USD)", Propagation Delay=75ns, Radiation Hardening=No, REACH SVHC="No SVHC", Rise Time=30ns, RoHS=Yes, RoHS Compliant=Yes, Series=-, Stock 1=562, Supplier 1=Digi-Key, Supply Current=8mA, Turn-On Delay Time=75ns, Width=3.91mm
Y1: "AS-SMD Series 16 MHz ±30 ppm 16pF -20°C TO +70°C SMT Microprocessor Crystal", Capacitance=1.6E-11F, Frequency=16MHz, Frequency Tolerance=30ppm, Load Capacitance=16pF, Manufacturer="Raltron Electronics", Max Operating Temperature=70°C, Min Operating Temperature=-20°C, Supplier Part Number 1=5574900, ComponentLink2Description=OZDISAN_LINK, ComponentLink2URL=https://ozdisan.com/Product/Detail/40446/AS-16-000-16-SMD-TR, Lead Free="Lead Free", Manufacturer Part Number=AS-16.000-16-SMD-TR, OZDISAN_PRICE="1.95 TRY", Pricing 1="1000=0,12700 (USD)", RoHS=Yes, Supplier 1="Future Electronics"

## Via types
v1: diameter 39.37, hole 19.68, L1 to L2, tented both sides, 19 vias
v2: diameter 23.62, hole 11.81, L1 to L2, tented both sides, 16 vias
v3: diameter 39.37/23.62 (per signal layer), hole 23.62, L1 to L2, 2 vias

## Nets (pads, with @x,y where several pads share a name; then routed paths per layer and width w, separated by ;. In a path a pad name is that pad's centre, name@x,y a point inside that pad or via, vN(x,y) a via of type N, cw(c..) or ccw(c..) an arc to the next point about the centre after c; other vN are vias at no path point)
+5V: F1.1 J1.6 J2.3 | length 572.5
  L1 w25: J2.3 2065,665 2065,1105 J1.6
  L2 w25: F1.1 J2.3
+5VCC: F1.2 FB1.1 FB2.1 R4.2 | length 1385
  L1 w11.81: R4.2 1344.21,316.81 FB2.1
  L1 w19.68: R4.2 R4.2@1273.42,319.7 ; FB2.1 1357.87,322.6 1365.75,314.72 1365.75,295.72 1386.23,275.24 1386.23,250.3 v1(1386.54,250) ; FB1.1 v1(1720,1024.07)
  L2 w19.68: v1(1386.54,250) 1387.41,249.12 1449.06,249.12 1458.18,240 1478.35,240 F1.2@1888.5,650.16 ; v1(1720,1024.07) 1723.77,1020.3 1744.28,1020.3 1927.4,837.18 1927.4,750.23 1898.35,721.17 F1.2
+AREF: C1.1 U1.20 | length 76.9
  L1 w11.81: U1.20 1517.87,817.48 1517.87,888.35 C1.1
+AVCC: C2.2 C3.2 FB1.2 U1.18 | length 216.5
  L1 w19.68: U1.18 1579.37,815.98 1579.37,889.84 C3.2 C2.2 1641.06,891.54 1718.94,891.54 FB1.2
+VCC: C4.2 C5.2 C6.2 D4.1 FB2.2 R5.2 U1.4 U1.6 | length 1138.5
  L1 w19.68: v1(1070,669.37) D4.1 ; D4.1@1072.19,692.18 1138.29,692.18 R5.2 ; v1(1080,310) 1168.46,398.46 1428.94,398.46 C4.2 C5.2 ; U1.4 1485.24,483.66 1485.24,404.29 C5.2 ; U1.6 1548.23,483.66 1548.23,401.3 C6.2 C5.2
  L2 w19.68: v1(1070,669.37) 1070.16,669.21 1070.16,600.79 1080,590.94 v1(1080,310)
+VMN: +.1 C10.1 C11.1 C12.1 C13.1 C14.1 C15.1 T1.2 T3.2 T5.2 U2.6 U3.6 U4.6 | length 3173.8
  L1 w19.68: C14.1 410,232.24 439.53,261.77 C15.1 492.56,266.97 520.16,266.97 U4.6 ; C12.1 410,582.24 439.53,611.77 C13.1 492.56,616.97 520.16,616.97 U3.6 ; C10.1 410,932.24 439.53,961.77 C11.1 482.56,976.97 520.16,976.97 U2.6
  L1 w39.37: C14.1 405.51,220 350,220 240,330 240,640 ; C12.1 314.49,565.51 240,640 ; C10.1 335.51,915.51 240,820 v1(240,730) 240,640
  L2 w39.37: +.1 v1(240,730)
  L2 w118.11: +.1 267.09,897.09 434.88,897.09 490,952.2 T1.2 T3.2 T5.2
  other v3: 150,730
A0: R21.2 R22.1 R27.1 U1.23 | length 552.1
  L1 w11.81: U1.23 1426.18,820.28 1426.18,857.39 1430,861.21 v2(1430,864.41)
  L2 w11.81: v2(1430,864.41) 1432.26,866.67 1432.26,888.45 1459.4,915.59 1532.68,915.59 1561.61,886.66 1561.61,868.86 R22.1 R21.2 1659.8,868.86 1659.8,886.66 1692.83,919.68 1750.32,919.68 1790,880 1790,860.94 R27.1
A1: R23.2 R24.1 R28.1 U1.24 | length 696.9
  L1 w11.81: U1.24@1390.35,815.95 U1.24 1389.76,869.76 1410,890 v2(1470,890)
  L2 w11.81: v2(1470,890) 1530.43,890 1541.93,878.5 1541.93,818.54 R24.1 R23.2 1680,819.06 1680,879.01 1700.99,900 1730,900 1750,880 1750,830 1764.44,815.56 1765.38,815.56 R28.1
A2: R25.2 R26.1 R29.1 U1.25 | length 549.7
  L1 w11.81: U1.25 1406.57,760.24 1416.8,750 v2(1420,750)
  L2 w11.81: v2(1420,750) 1490,680 1530.47,680 R26.1 R25.2 1659.8,711.14 1659.8,693.34 1673.15,680 1750.94,680 R29.1
AH: R9.2 U1.13 U2.2 | length 1131.6
  L1 w11.81: U2.2 794.53,925 R9.2 1085.05,899.53 v2(1227.24,757.34) ; v2(1590,650) 1593.2,650 1608.94,665.75 U1.13
  L2 w11.81: v2(1227.24,757.34) 1227.24,754.14 1233.07,748.31 1233.07,636.93 1240,630 1568.24,630 1588.24,650 v2(1590,650)
AIN0: R21.1 R23.1 R25.1 U1.10 | length 549
  L1 w11.81: U1.10 1665.98,570.63 1739.37,570.63 v2(1740,570)
  L2 w11.81: R25.1 R23.1 ; R21.1 R23.1 ; v2(1740,570) 1820,650 1820,739.96 1799.96,760 1740,760 R23.1
AL: R11.2 U1.14 U2.4 | length 1162.8
  L1 w11.81: U2.4 740.61,1022.26 817.26,1022.26 R11.2 1001.24,1019.53 1258.69,762.08 v2(1258.69,759.13) ; v2(1580,680) 1583.2,680 1600.44,697.24 U1.14
  L2 w11.81: v2(1258.69,759.13) 1260.79,757.03 1260.79,656.92 1267.71,650 1550,650 v2(1580,680)
BH: R13.2 U1.31 U3.2 | length 659.5
  L1 w11.81: U3.2 804.53,565 R13.2 960.47,549.53 1017.59,492.41 1030.65,492.41 1212.4,492.4 1291.26,571.26 U1.31
BL: R15.2 U1.30 U3.4 | length 701.4
  L1 w11.81: U3.4 740.14,667.26 817.74,667.26 R15.2 877.8,669.53 1035.23,512.1 1038.8,512.1 1202.09,512.09 1290,600 1331.89,600 U1.30
CH: R17.2 U1.1 U4.2 | length 796.8
  L1 w11.81: U4.2 794.53,215 R17.2 899.53,189.53 1161.26,451.26 1269.15,451.26 1276.95,459.06 1384.84,459.06 1389.76,463.98 U1.1
CL: R19.2 U1.32 U4.4 | length 694.4
  L1 w11.81: U4.4 740.61,312.26 817.26,312.26 R19.2 951.7,441.23 1083.57,441.23 1113.29,470.94 1245.16,470.94 1313.98,539.76 U1.32
GND: -.1 C1.2 C2.1 C3.1 C4.1 C5.1 C6.1 C7.1 C8.2 C9.2 C10.2 C11.2 C12.2 C13.2 C14.2 C15.2 D1.1 D2.1 D3.1 J1.1 J2.1 MH2.1 MH3.1 MH4.1 R9.1 R11.1 R13.1 R15.1 R17.1 R19.1 R27.2 R28.2 R29.2 T2.3 T4.3 T6.3 U1.3 U1.5 U1.21 U2.1 U2.3 U2.8 U3.1 U3.3 U3.8 U4.1 U4.3 U4.8 | length 6809.6
  L1 w23.62: MH4.1 265.31,150 310.82,104.49 C14.2 ; v1(150,600) 110,640 110,959.1 150,999.1 MH2.1 370.47,1030 C11.2 ; v1(313.94,665.63) 316.12,667.81 378.29,667.81 C13.2 ; v1(320,450) 405.51,450 C12.2 ; U4.8 522.13,97.87 v1(580,40) ; R15.1 885.27,610.47 895.74,600 v1(900,600) ; v1(1020,670) 1023.01,666.99 1023.01,636.99 1030,630 C7.1 ; D3.1 1273.46,253.94 1299.68,253.94 1315.74,270 v1(1320,270) ; v1(1400,550) 1403.96,550 1439.71,585.75 v1(1484.25,585.75) ; U1.3 1452.76,554.25 v1(1484.25,585.75) ; U1.21 v1(1484.25,585.75) ; U1.5 1515.75,554.25 v1(1484.25,585.75) ; v1(1630,990) 1630,985.74 1637.05,978.69 1637.05,952.48 C2.1 ; v1(1670,490) 1674.26,490 1701.11,463.15 J2.1 2060,300 MH3.1 ; v1(1970,610) D1.1
  L2 w23.62: v1(313.94,665.63) 309.67,665.63 277.63,633.58 187.84,633.58 154.26,600 v1(150,600) 296.99,453.01 316.99,453.01 v1(320,450) ; v1(900,600) 900,604.26 880,624.26 880,730 916.46,766.46 916.46,767.45 927.99,778.98 991.54,778.98 1020,750.52 v1(1020,670) ; T6.3 1160.24,205.67 1172.05,217.48 1191.73,217.48 1244.25,270 v1(1320,270) 1323.01,273.01 1353.87,273.01 1369.2,288.35 1372.33,288.35 1383.86,299.88 1383.86,309.6 1410,335.74 v1(1410,340) 1410,535.74 1400,545.74 v1(1400,550) ; v1(1484.25,585.75) 1574.25,585.75 v1(1670,490) ; J1.1@1570,1102.13 J1.1 ; v1(1630,990) 1674.72,945.28 1764.72,945.28 R27.2 R28.2 ; R29.2 R28.2 ; v1(1890,790) R28.2 ; v1(1970,610) 1970,545.28 2052.13,463.15 J2.1 J2.1@2067.87,463.15
  L2 w118.11: -.1 374.02,185.98 T2.3 400.24,159.76 490,70 780,70 ; T4.3 780.24,70.24 780,70 ; T6.3 1044.25,70 780,70
  other v3: 150,460
MISO: J1.4 R3.2 U1.16 | length 571
  L1 w11.81: U1.16 1740.24,760.24 1800,820 1800,1032.13 J1.4@1870,1102.13 ; R3.2 J1.4@1870,1102.13 ; J1.4 J1.4@1870,1102.13
MOSI: J1.5 R2.2 U1.15 | length 615.1
  L1 w11.81: U1.15 1738.74,728.74 1820,810 1820,970 1830,980 1940.47,980 R2.2 J1.5
NetC8_1: C8.1 R6.1 R7.1 Y1.1 | length 368.7
  L1 w11.81: Y1.1 1486.06,100 1519.53,133.46 C8.1 R7.1 1610.24,230.24 1610.24,340.24 R6.1
NetD1_2: D1.2 R2.1 | length 80.5
  L1 w11.81: D1.2 R2.1
NetD2_2: D2.2 R3.1 | length 80.5
  L1 w11.81: D2.2 R3.1
NetD3_2: D3.2 R4.1 | length 67.2
  L1 w11.81: D3.2 1210.97,250.5 1210.97,316.3 R4.1
NetR1_2: R1.2 U1.17 | length 72.2
  L1 w11.81: U1.17 1614.88,820 R1.2
NetR10_1: R10.1 T1.1 | length 126.4
  L1 w11.81: v2(630,770) 630,770.47 R10.1
  L2 w11.81: T1.1 579.76,735.67 611.83,767.74 627.74,767.74 v2(630,770)
NetR10_2: R10.2 U2.7 | length 188.4
  L1 w19.68: U2.7 575,925 600.47,899.53 R10.2
NetR12_1: R12.1 T2.1 | length 984.7
  L1 w11.81: R12.1 659.53,860.47 710,810 v2(710,790)
  L2 w11.81: T2.1 579.76,205.67 634.41,260.31 634.41,724.41 681.04,771.04 687.84,771.04 706.8,790 v2(710,790)
NetR12_2: R12.2 U2.5 | length 128.4
  L1 w19.68: U2.5 575,1025 595.71,1045.71 595.71,1085.24 R12.2
NetR14_1: R14.1 T3.1 | length 672.1
  L1 w11.81: R14.1 759.76,450 779.76,430 880,430 916.82,466.82 v2(1029.91,466.82)
  L2 w11.81: T3.1 959.76,640.24 1010,590 1010,490 1027.65,472.35 1027.65,469.08 v2(1029.91,466.82)
NetR14_2: R14.2 U3.7 | length 158.1
  L1 w19.68: U3.7 540.24,565 600.47,504.76 R14.2
NetR16_1: R16.1 T4.1 | length 753.6
  L1 w11.81: R16.1 659.76,729.76 659.76,690.24 v2(660,690)
  L2 w11.81: v2(660,690) 660,600 700,560 700,320 740,280 840,280 896.61,223.39 942.05,223.39 959.76,205.67 T4.1
NetR16_2: R16.2 U3.5 | length 108.1
  L1 w19.68: U3.5 540.24,665 542.2,666.97 542.2,671.73 R16.2
NetR18_1: R18.1 T5.1 | length 1457.9
  L1 w11.81: R18.1 742.16,100 802.16,40 1190,40 1210,60 1210,117.33 1298.65,205.98 1389.84,205.98 1420,236.14 v2(1420,280) ; v2(1407.73,602.27) 1408.86,603.41 1408.86,678.86 v2(1410,680)
  L2 w11.81: T5.1 1343.78,720 1370,720 v2(1410,680) ; v2(1407.73,602.27) 1407.73,600.51 1435.59,572.65 1435.59,435.13 1443.46,427.25 1443.46,303.46 v2(1420,280)
NetR18_2: R18.2 U4.7 | length 158.1
  L1 w19.68: U4.7 540.24,215 600.47,154.76 R18.2
NetR20_1: R20.1 T6.1 | length 975.9
  L1 w11.81: R20.1 659.53,182.13 721.97,119.69 750.32,119.69 800,70 v2(1180,70)
  L2 w11.81: v2(1180,70) 1300,190 1335.75,190 T6.1
NetR20_2: R20.2 U4.5 | length 108.1
  L1 w19.68: U4.5 540.24,315 542.2,316.97 542.2,321.73 R20.2
phaseA: R22.2 T1.3 T2.2 | length 1501.5
  L2 w11.81: T1.3 400.24,735.67 488.82,824.25 1475.67,824.25 R22.2
  L2 w118.11: T1.3 434.88,681.34 434.88,489.13 T2.2
phaseB: R24.2 T3.3 T4.2 | length 1104.6
  L2 w11.81: T3.3 780.24,735.67 849.13,804.57 1465.43,804.57 1480,790 R24.2
  L2 w118.11: T3.3 780.24,597.27 814.88,562.63 814.88,489.13 T4.2
phaseC: R26.2 T5.3 T6.2 | length 717.6
  L2 w11.81: T5.3@1160.24,735.67 1209.45,784.88 1446.54,784.88 R26.2
  L2 w118.11: T5.3 1160.24,606.76 1194.88,572.11 1194.88,489.13 T6.2
PWM_IN: J2.2 U1.12 | length 426.1
  L1 w11.81: U1.12 1825.75,634.25 1900,560 2058.43,560 J2.2
R\E\S\E\T\: C7.2 D4.2 R5.1 R8.2 U1.29 | length 355.3
  L1 w19.68: D4.2 1072.19,567.82 1138.29,567.82 R8.2 1194.61,624.13 1194.61,625.08 C7.2 ; R5.1 C7.2 ; C7.2@1201.16,633.27 C7.2@1202.8,633.27 ; U1.29 1333.66,633.27 C7.2@1202.8,633.27 ; C7.2 C7.2@1202.8,633.27
R\E\S\E\T\_N: J1.2 R8.1 | length 1388.2
  L1 w11.81: R8.1 1161.3,531.77 1046.97,531.77 986.54,592.21 986.54,696.54 1040,750 1180,750 1200,730 1265.74,730 1289.37,753.63 1289.37,799.37 1490,1000 1490,1140 1513.15,1163.15 1626.85,1163.15 1670,1120 J1.2
SCK22: J1.3 R1.1 | length 310.9
  L1 w11.81: R1.1 1780,860.47 1780,1060 1779.79,1060.21 1779.79,1100.21 J1.3
XTAL1: R6.2 U1.7 | length 98.1
  L1 w11.81: U1.7 1578.74,430.79 R6.2
XTAL2: C9.1 R7.2 U1.8 Y1.2 | length 537.6
  L1 w11.81: U1.8 1610.24,463.98 1670,404.21 1670,230.47 R7.2 C9.1 1760.47,133.46 1793.94,100 Y1.2
pads on no net: U1.2 U1.9 U1.11 U1.19 U1.22 U1.26 U1.27 U1.28

## Polygon pours and split planes (outlines as drawn)
GND on L1 "NONET_L-01_P-001" (solid, pour order 0): 570,900 460,900 460,870 450,860 320,860 270,810 270,660 330,600 360,630 400,630 410,640 410,690 510,790 550,790 570,810
GND on L1 "NONET_L-01_P-001" (solid, pour order 1): 630,480 690,480 710,460 770,460 790,440 880,440 900,460 900,520 800,520 780,540 700,540 690,550 690,580 700,590 770,590 780,580 870,580 870,620 850,640 700,640 700,680 710,690 770,690 880,800 880,860 870,870 800,870 790,880 790,900 710,900 700,910 700,950 790,950 810,930 870,930 880,940 880,980 870,990 790,990 780,1000 700,1000 700,1040 710,1050 810,1050 840,1080 840,1160 820,1180 10,1180 0,1170 0,0 500,0 560,60 560,180 550,190 470,190 440,160 340,160 200,300 200,840 340,980 390,980 410,1000 410,1050 490,1050 560,1120 680,1120 690,1110 690,1060 670,1040 670,870 730,810 730,780 720,770 700,770 690,760 680,690 630,630
GND on L1 "NONET_L-01_P-001" (solid, pour order 4): 790,230 880,230 880,280 790,280 780,290 690,290 680,280 680,180 730,130 790,130 790,110 810,90 1160,90 1310,240 1310,280 1240,280 1240,220 950,220 890,160 800,160 770,190 700,190 700,240 780,240
GND on L1 "NONET_L-01_P-001" (solid, pour order 5): 1390,370 1390,310 1430,310 1440,300 1440,200 1490,200 1490,280 1570,280 1580,290 1580,370
GND on L1 "NONET_L-01_P-001" (solid, pour order 8): 1840,840 2010,840 2040,810 2040,750 2010,720 1850,720 1840,730
GND on L1 "NONET_L-01_P-001" (solid, pour order 7): 1610,1150 1530,1150 1510,1130 1510,990 1480,960 1480,920 1670,920 1670,1020 1620,1070 1620,1140
GND on L1 "NONET_L-01_P-001" (solid, pour order 6): 1790,160 1790,460 1850,520 2200,520 2340,380 2340,20 2100,20 1960,160
GND on L1 "NONET_L-01_P-001" (solid, pour order 2): 280,520 290,510 450,510 480,540 540,540 560,520 560,380 530,350 420,350 410,340 410,290 400,280 340,280 280,340

## Silkscreen, mask and mechanical layers (free items; w line width, h text height)
Top Overlay:
  text "BRAIN.DLL" at 820,1075 h70
  text "GND" at 1545,1025 h20
  text "RST" at 1645,1025 h20
  text "SCK" at 1745,1025 h20
  text "5V" at 2060,1025 h20
  text "MOSI" at 2030,980 h20 r90
  text "MISO" at 1930,975 h20 r90
  text "5V" at 1925,650 h20
  text "PWM" at 1910,555 h20
  text "GND" at 1910,455 h20
  text "BRAIN.DLL" at 120,335 h60 r90
Bottom Overlay:
  text "I3EYTULLAH" at 2205,315 h80 r270
Board Outline:
  the board outline again, w7.87

## Text inside footprints (layer, text, board x,y; h text height)
J1: Top Overlay "1" at 1485,1145 h39.37 r90
J2: Top Overlay "1" at 2081.5,323.54 h39.37 r90